# Altium PCB ExerciseMate_Receiver.PcbDoc
Units mm, origin at the board's own origin, x right, y up, seen from the top; angles counter-clockwise.
Board outline 50.8 x 39.24 mm, 4 copper layers (Top Layer, GND01, GND02, Bottom Layer), stack 0.603 mm thick; 29 components, 22 nets, 111 pads, 22 vias.
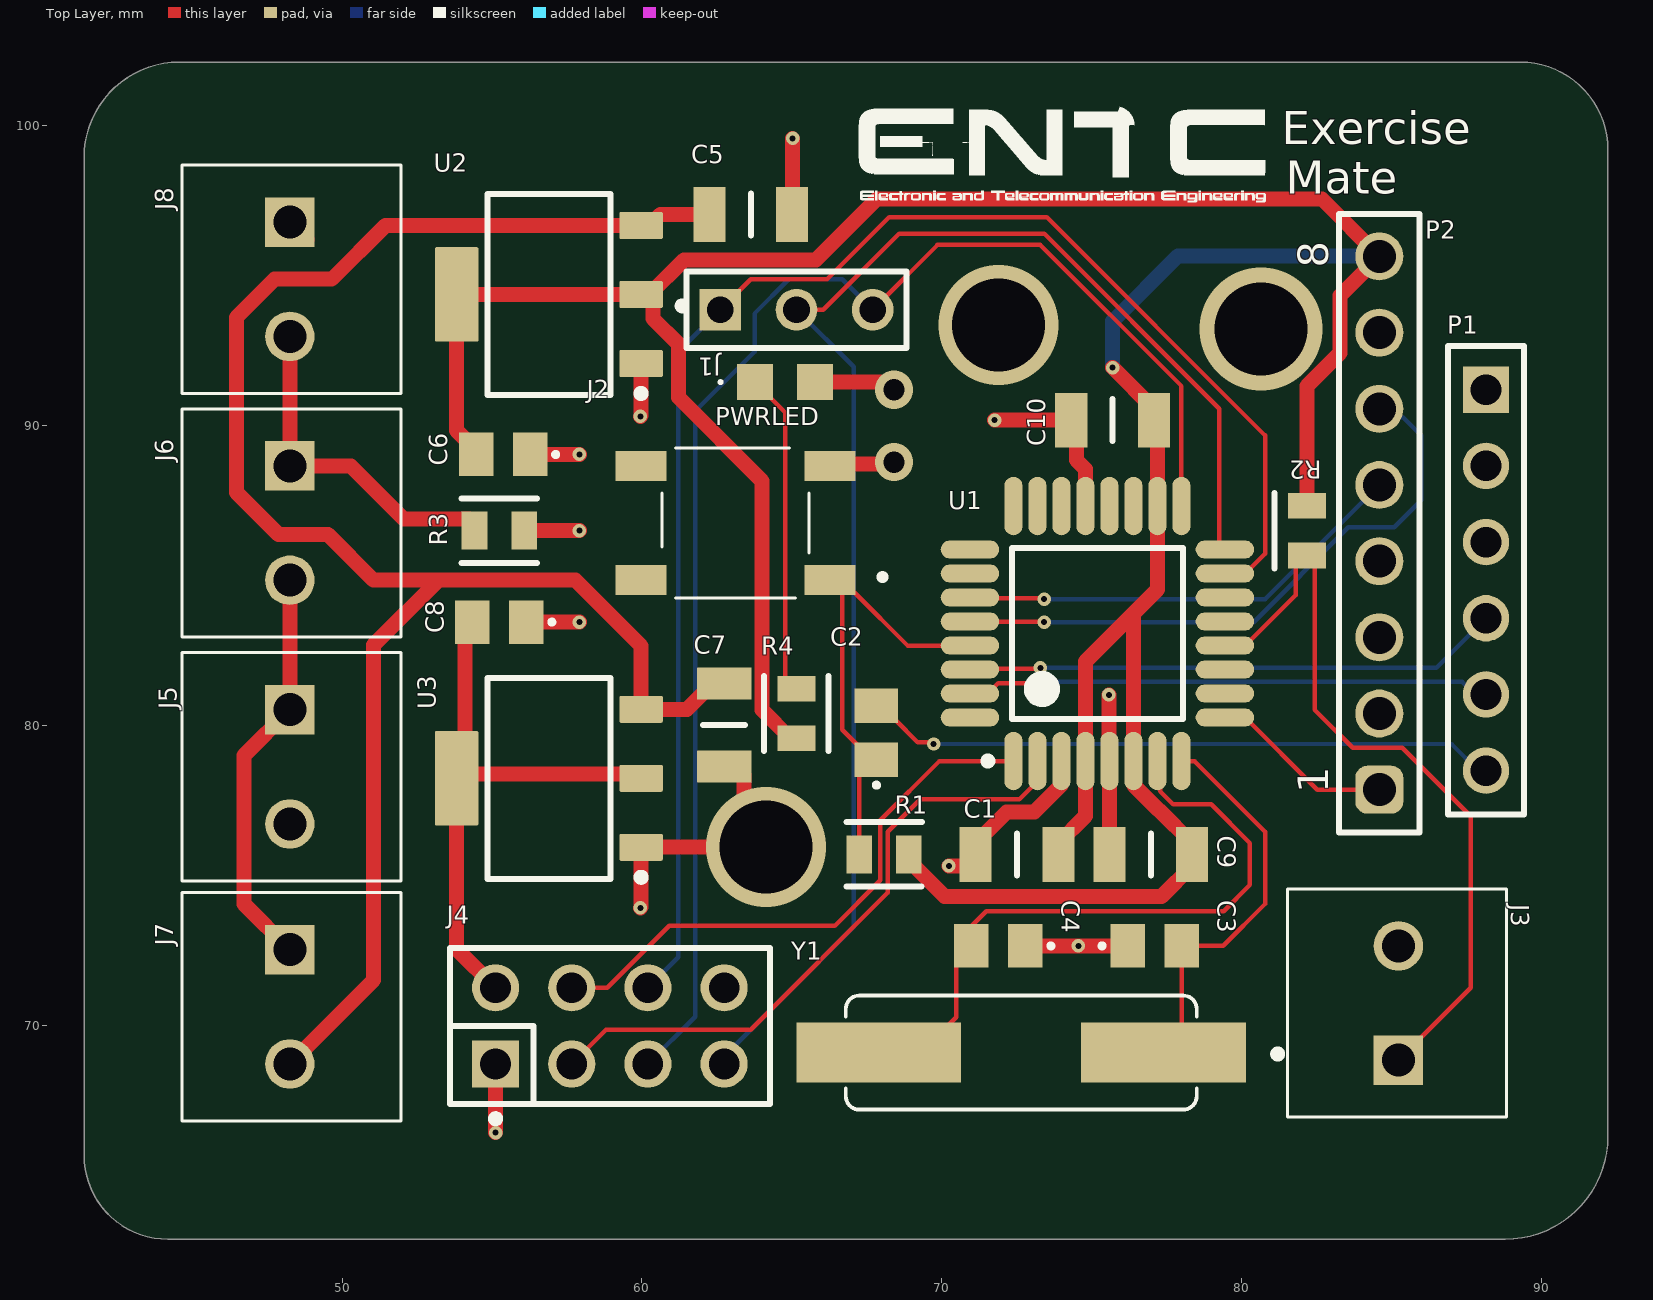
[diagram p0: Top Layer view]
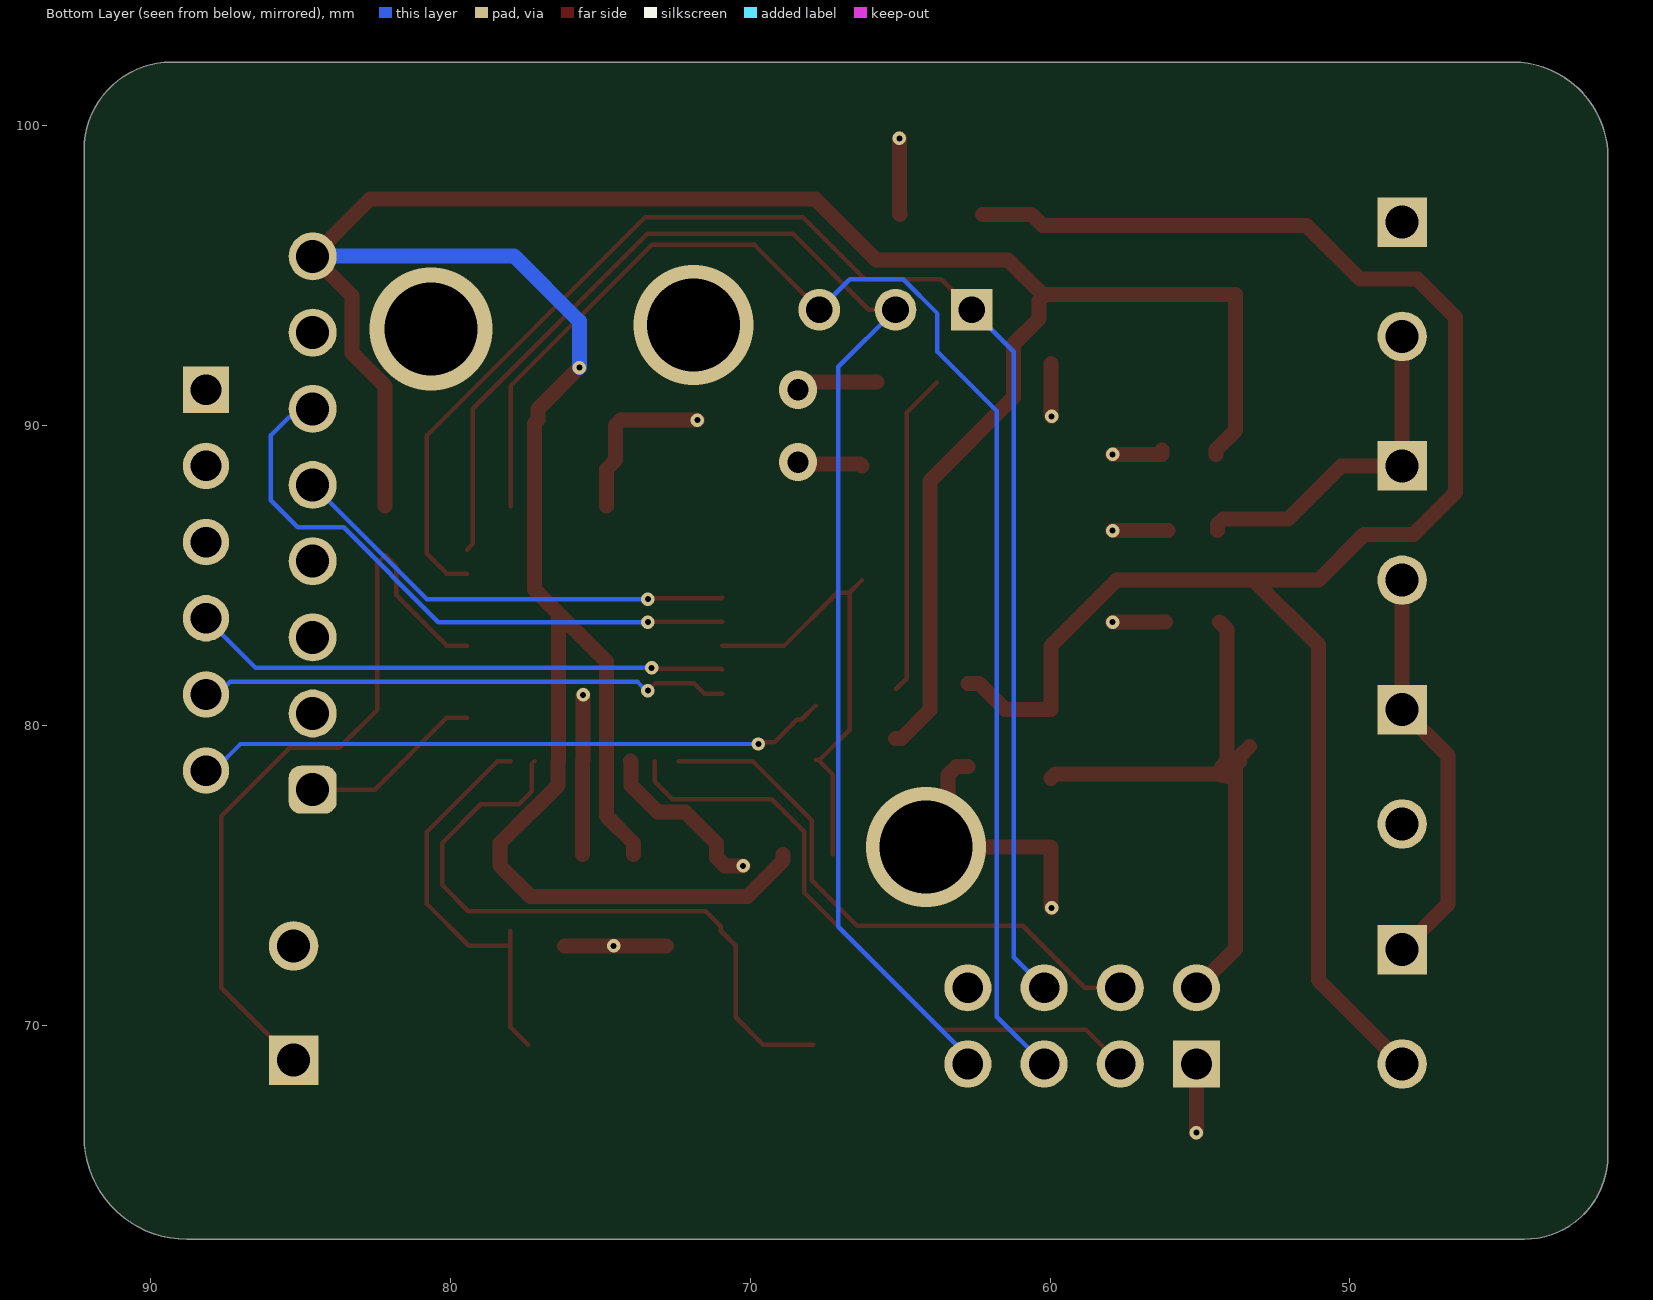
[diagram p1: Bottom Layer view, seen from below]
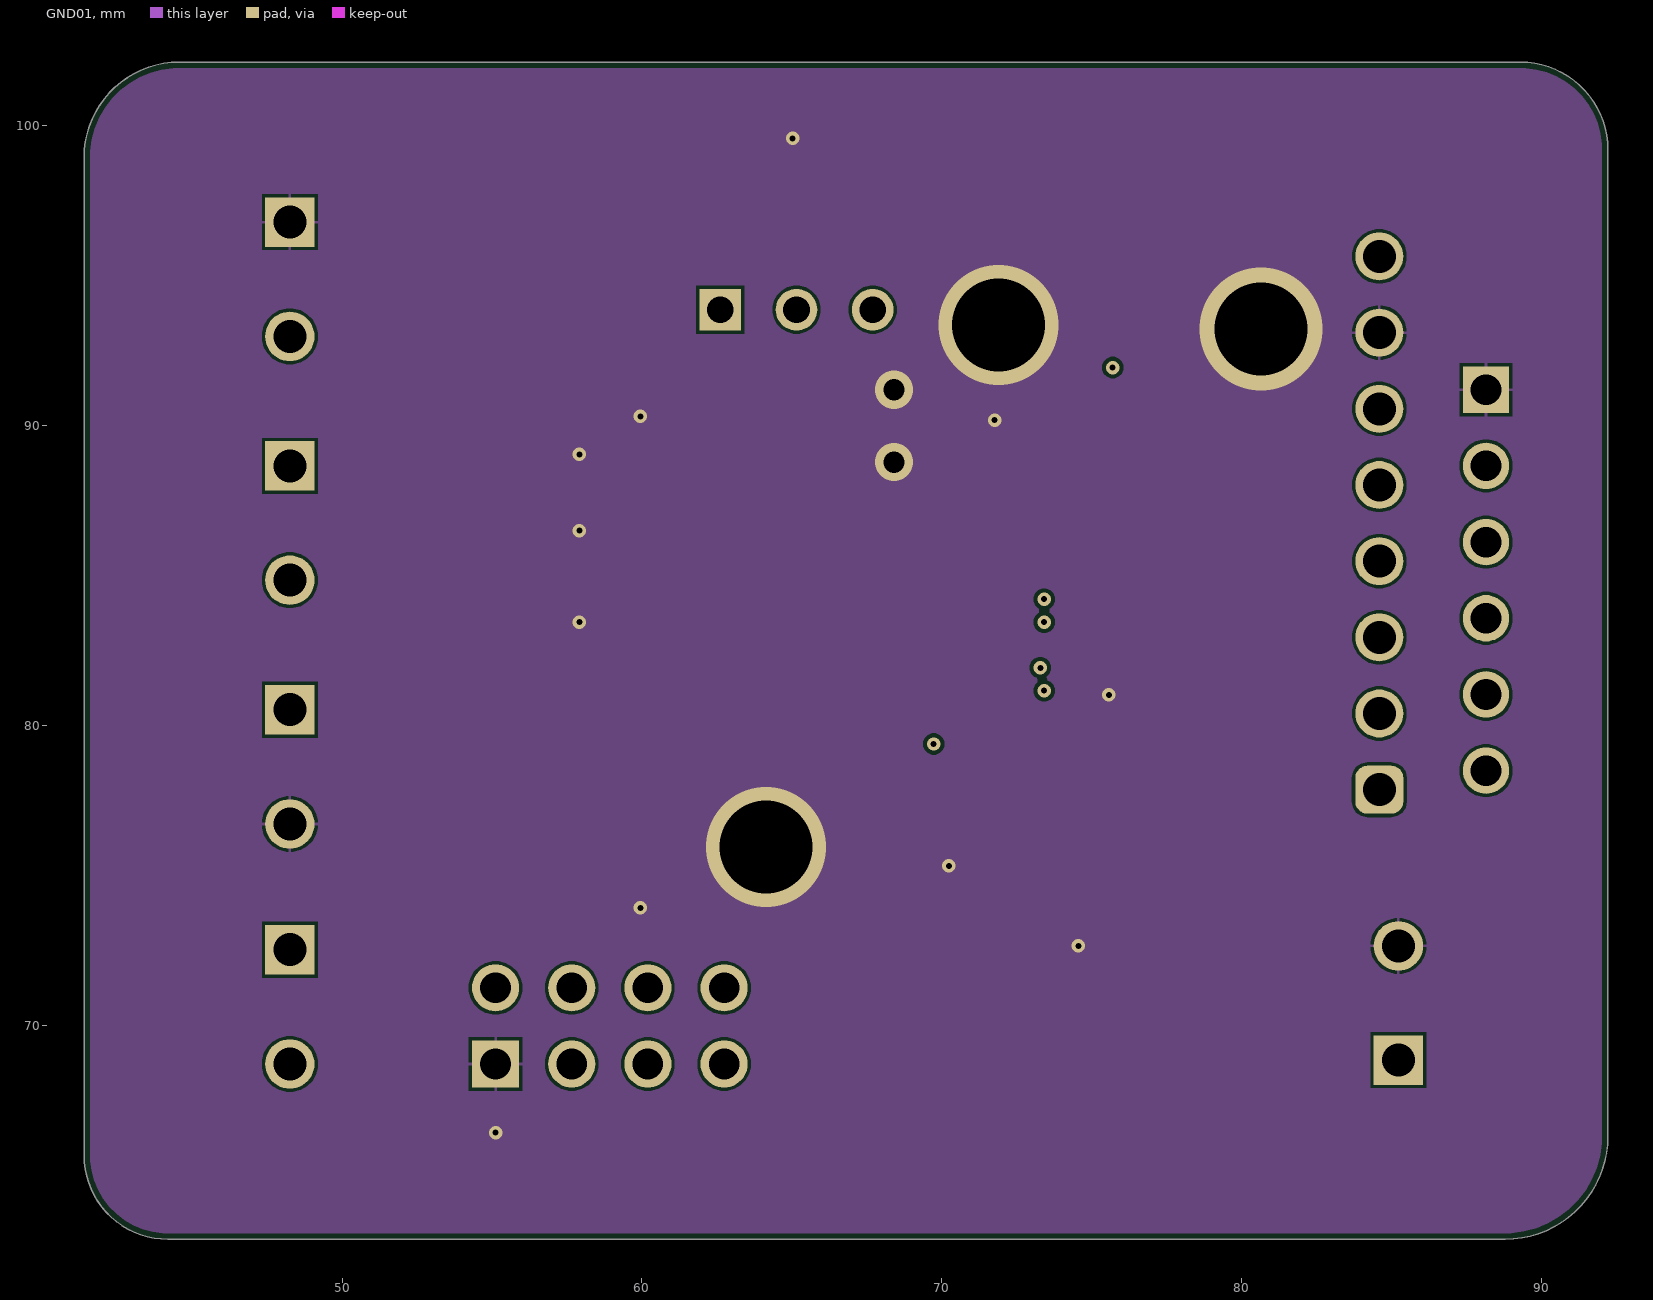
[diagram p2: GND01]
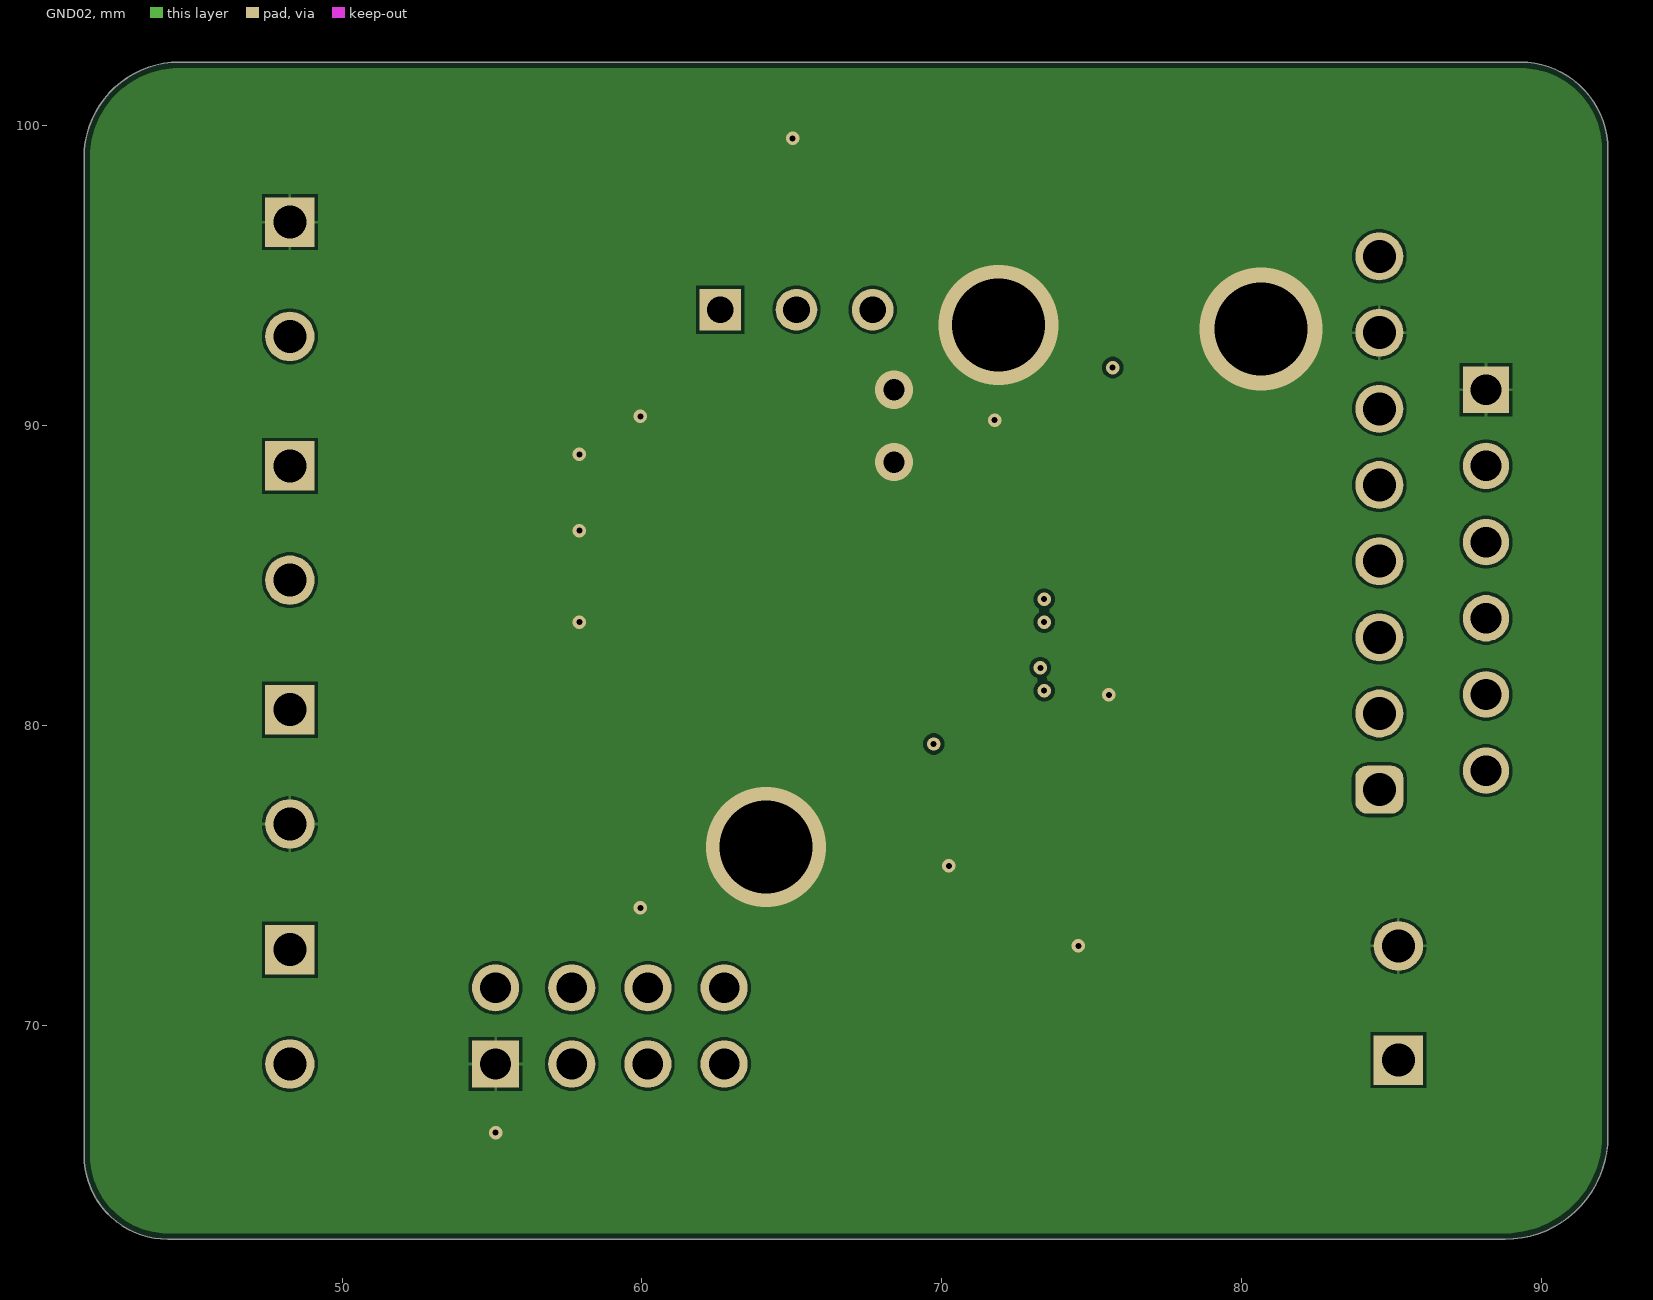
[diagram p3: GND02]
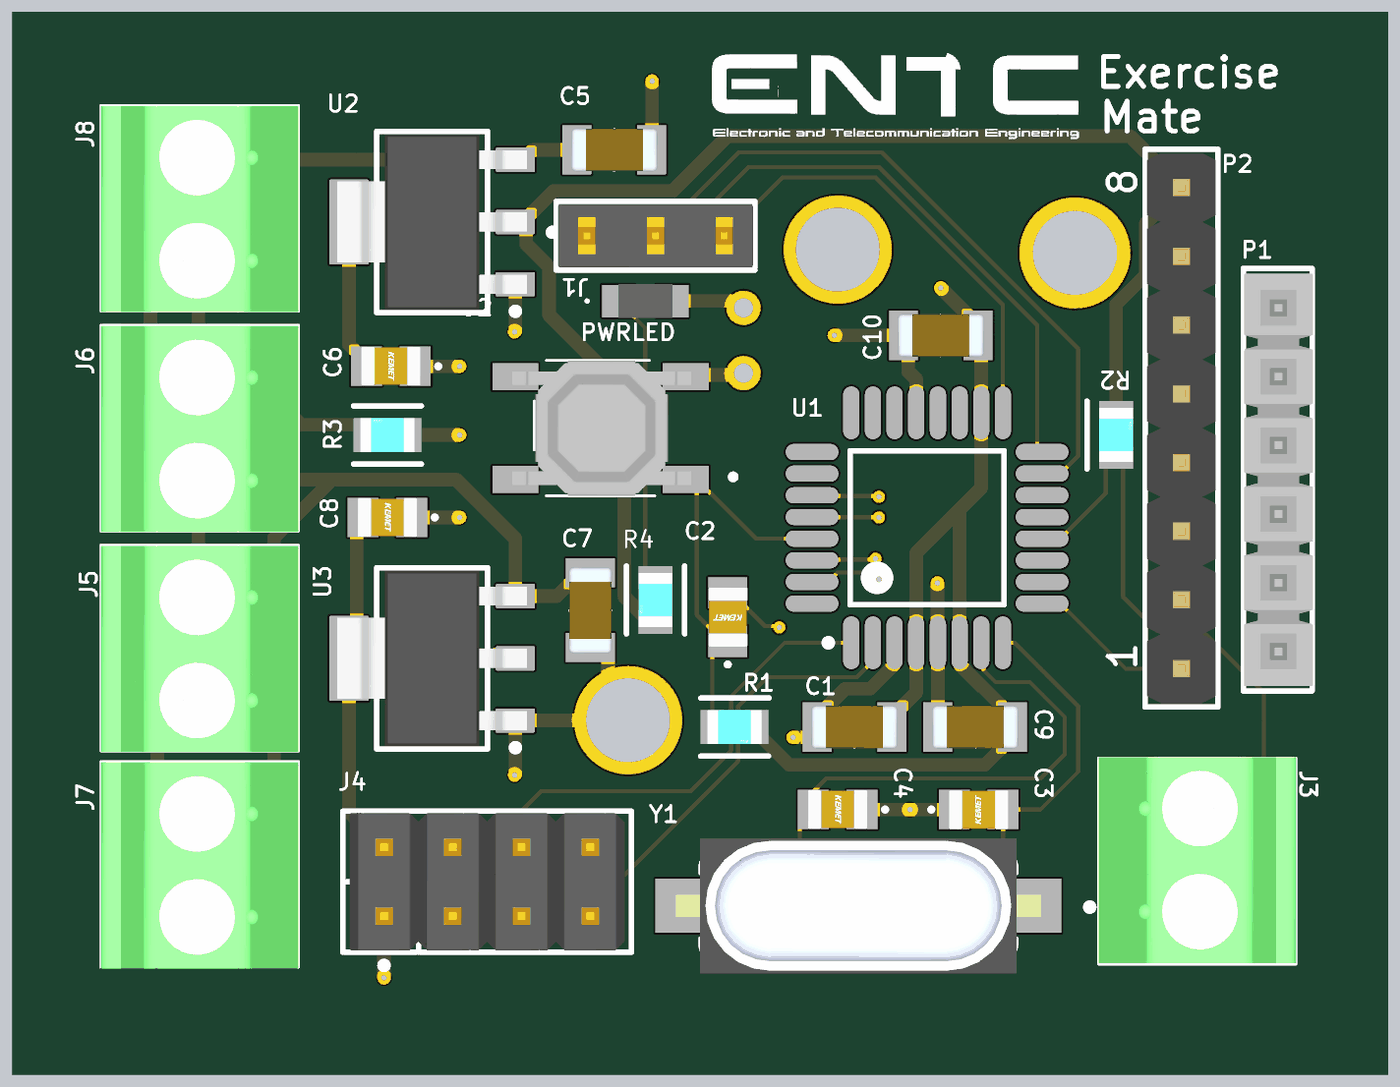
[diagram p4: 3D render of the assembled board from above, using the file's embedded part models]

## Layer stack, top to bottom
Top Solder: solder mask 0.0102, Solder Resist, Dk 3.5
Top Layer: signal copper 0.0356
Dielectric 2: prepreg 0.0711, PP-006, Dk 4.1
GND01: signal copper 0.035
Dielectric 1: dielectric 0.32, FR-4, Dk 4.8
GND02: signal copper 0.035
Dielectric 3: prepreg 0.0711, PP-006, Dk 4.1
Bottom Layer: signal copper 0.0356
Bottom Solder: solder mask 0.0102, Solder Resist, Dk 3.5

## Board outline
44.196,62.865 88.773,62.865 ccw(c88.773,66.294) 92.202,66.294 92.202,99.187 ccw(c89.281,99.187) 89.281,102.108 44.577,102.108 ccw(c44.577,98.933) 41.402,98.933 41.402,65.659 ccw(c44.196,65.659)

## Design rules (kind name [scope] priority, off if disabled: settings)
BoardOutlineClearance [All] p1: gap=0.2 ignorepadtopadclearanceinfootprint=FALSE
Clearance [All] p1: gap=0.102 ignorepadtopadclearanceinfootprint=FALSE except(0.127: Arc-Via Track-Via SMDPad-Via THPad-Via Via-Via Via-Fill Via-Poly Via-Region Via-Text; 0.25: Arc-Hole Track-Hole SMDPad-Hole THPad-Hole Via-Hole Fill-Hole Poly-Hole Region-Hole Text-Hole)
ComponentClearance [All] p1: gap=0.102 collisioncheckmode=3 verticalgap=0.102 showdistances=TRUE
DiffPairsRouting [All] p1: maxlimit=0.102 minlimit=0.102 mostfreqgap=0.102 toplayer_minwidth=0.102 toplayer_maxwidth=1816.048 toplayer_prefwidth=0.102 midlayer1_minwidth=0.102 midlayer1_maxwidth=1816.048 midlayer1_prefwidth=0.102 midlayer2_minwidth=0.102 midlayer2_maxwidth=1816.048 midlayer2_prefwidth=0.102 bottomlayer_minwidth=0.102 bottomlayer_maxwidth=1816.048 bottomlayer_prefwidth=0.102 maxuncoupledlength=12.7
Height [All] p1: minheight=0 maxheight=1816.048 prefheight=12.7
HoleSize [All] p1: absolutevalues=TRUE maxlimit=6.3 minlimit=0.2 maxpercent=80.000 minpercent=20.000
HoleToHoleClearance [All] p1: gap=0.25 allowstackedmicrovias=FALSE
MinimumAnnularRing [All] p1: minimumring=0.076
MinimumSolderMaskSliver [All] p1: minsoldermaskwidth=0
PlaneClearance [All] p1: clearance=0.102
PlaneConnect PlaneConnectPowerPads [InPadClass('PowerPads')] p1: planeconnectstyle=Direct reliefexpansion=0.508 reliefentries=4 reliefconductorwidth=0.254 reliefairgap=0.254
PlaneConnect [All] p2: pad.planeconnectstyle=Relief pad.reliefexpansion=0.3 pad.reliefentries=4 pad.reliefconductorwidth=0.102 pad.reliefairgap=0.102 via.planeconnectstyle=Direct via.reliefexpansion=0.3 via.reliefentries=4 via.reliefconductorwidth=0.127 via.reliefairgap=0.127
PolygonConnect PolygonConnectPowerPads [All vs (InPadClass('PowerPads'))] p1: connectstyle=Direct reliefconductorwidth=0.254 reliefentries=4 polygonreliefangle="90 Angle" airgapwidth=0.254
PolygonConnect [All] p2: thpad.connectstyle=Relief thpad.reliefconductorwidth=0.102 thpad.reliefentries=4 thpad.polygonreliefangle="90 Angle" thpad.airgapwidth=0.102 smdpad.connectstyle=Relief smdpad.reliefconductorwidth=0.102 smdpad.reliefentries=4 smdpad.polygonreliefangle="90 Angle" smdpad.airgapwidth=0.102 via.connectstyle=Direct via.reliefconductorwidth=0.127 via.reliefentries=4 via.polygonreliefangle="90 Angle" via.airgapwidth=0.127
RoutingVias [All] p1: holewidth=0.2 width=0.45 viastyle="Through Hole" minholewidth=0.2 minwidth=0.45 maxholewidth=6.3 maxwidth=6.55
SilkToSilkClearance [All] p1: silktosilkclearance=0
SilkToSolderMaskClearance [IsPad] p1: minsilkscreentomaskgap=0.102 clearancetoexposedcopper=TRUE
SolderMaskExpansion [All] p1: expansion=0.075 istentingtop=FALSE
Width [All] p1: maxlimit=1816.048 minlimit=0.102 preferedwidth=0.102
20 further rules are at their usual default settings.

## Classes and differential pairs
component class U_MCU: C1 C2 C3 C4 C9 C10 J1 J2 J3 P1 PWRLED R1 R2 R4 U1 Y1
component class top-level: J4 P2
component class Designator: C5 C6 C7 C8 J5 J6 J7 J8 R3 U2 U3

## Components (designator, comment, footprint, x,y, rotation, side; value= is the part's Value field where it differs from the comment)
C1 "10uF" CAPC3216X180N 72.5,75.692 r180 top
C2 "C0805R104J5RACTU" C0805 67.818,79.756 r90 top value=0.1uF
C3 "C0805C220F1HACTU" C0805 77.089,72.644 r0 top value=22pF
C4 "C0805C220F1HACTU" C0805 71.882,72.644 r180 top value=22pF
C5 "10uF" CAPC3216X180N 63.627,97.028 r0 top
C6 "C0805R104J5RACTU" C0805 55.372,89.027 r180 top value=0.1uF
C7 "10uF" CAPC3216X180N 62.738,80.01 r270 top
C8 "C0805R104J5RACTU" C0805 55.245,83.439 r180 top value=0.1uF
C9 "10uF" CAPC3216X180N 76.962,75.692 r180 top
C10 "10uF" CAPC3216X180N 75.692,90.17 r180 top
J1 "87224-3" FP-87224-3-MFG 65.151,93.853 r0 top
J2 "8-1437565-1" 814375651 63.119,86.741 r180 top
J3 "1727010" 1727010 85.217,68.834 r90 top
J4 "PBC04DAAN" FP-PBC04DAAN-MFG 58.928,69.977 r0 top
J5 "1727010" 1727010 48.26,80.518 r270 top value=Charger
J6 "1727010" 1727010 48.26,88.646 r270 top value=Main(9V)
J7 "1727010" 1727010 48.26,72.517 r270 top
J8 "1727010" 1727010 48.26,96.774 r270 top value=Backup(7.4V)
P1 "TSW-106-07-L-S" SMTC-TSW-106-07-X-S 88.138,91.186 r270 top value=Coding
P2 "61300811121" 61300811121 84.582,86.741 r90 top
PWRLED "598-2105-107F" 5982105107F 64.77,91.44 r180 top
R1 "10k" FP-RK73H2A-IPC_C 68.072,75.692 r0 top
R2 "10k" FP-RK73H2A-IPC_C 82.169,86.487 r90 top value=10K
R3 "0k" FP-RK73H2A-IPC_C 55.245,86.487 r180 top
R4 "220ohms" FP-RK73H2A-IPC_C 65.151,80.391 r270 top
U1 "ATmega328P-AU" 32A_M 75.184,83.058 r90 top
U2 "LM1117MPX-5.0/NOPB" DCY0004A_L 56.896,94.361 r180 top value="5V LDO"
U3 "LM1117MPX-3.3/NOPB" DCY0004A_L 56.896,78.232 r180 top value="3.3V LDO"
Y1 "FOXSDLF/160-20" XTAL_FOXSDLF/160-20 72.644,69.088 r180 top

## Footprints (in the part's own frame and the unit in brackets; to place one, negate y for a bottom-side part, rotate by r counter-clockwise, add the part's x,y. Pads: shape width x height; smd on the part's side, far side on the other; paste and mask are expansions set on the pad)
32A_M [mm] "Thin QFP, 32-Leads, Body 7x7mm, Pitch 0.8mm, IPC Low Density"
  oval 1.95x0.6 smd: 1(-4.25,2.8) 2(-4.25,2) 3(-4.25,1.2) 4(-4.25,0.4) 5(-4.25,-0.4) 6(-4.25,-1.2) 7(-4.25,-2) 8(-4.25,-2.8) 17(4.25,-2.8) 18(4.25,-2) 19(4.25,-1.2) 20(4.25,-0.4) 21(4.25,0.4) 22(4.25,1.2) 23(4.25,2) 24(4.25,2.8)
  oval 0.6x1.95 smd: 9(-2.8,-4.25) 10(-2,-4.25) 11(-1.2,-4.25) 12(-0.4,-4.25) 13(0.4,-4.25) 14(1.2,-4.25) 15(2,-4.25) 16(2.8,-4.25) 25(2.8,4.25) 26(2,4.25) 27(1.2,4.25) 28(0.4,4.25) 29(-0.4,4.25) 30(-1.2,4.25) 31(-2,4.25) 32(-2.8,4.25)
  silkscreen extent -4.37,-2.85 2.85,3.77, body extent -3.5,-3.5 3.5,3.5, height 1.2
1727010 [mm]
  rect 1.65x1.65 hole 1.1: 1(0,0)
  round 1.65 hole 1.1: 2(3.81,0)
  silkscreen extent -1.9,-3.6 5.71,3.7, body extent -1.87,-3.6 5.75,3.7, height 8.41
814375651 [mm]
  rect 1.7x1 smd: 1(-3.15,1.9) 2(3.15,1.9) 3(-3.15,-1.9) 4(3.15,-1.9)
  silkscreen extent -5,-2.5 2.45,2.5, body extent -3.34,-2.5 3.26,2.5, height 1.5
5982105107F [mm]
  rect 1.2x1.2 smd: 1(1,0) 2(-1,0)
  silkscreen extent 2.1,-0.05 2.2,0.05, body extent -1,-0.63 1,0.63, height 0.91
61300811121 [mm] "Pin Header, pitch 2.54 mm, THT, Vertical, single row, 8p"
  rrect50% 1.6x1.6 hole 1.1: 1(-8.89,0)
  round 1.6 hole 1.1: 2(-6.35,0) 3(-3.81,0) 4(-1.27,0) 5(1.27,0) 6(3.81,0) 7(6.35,0) 8(8.89,0)
  silkscreen extent -10.31,-1.34 10.31,1.34, body extent -10.16,-1.27 10.16,1.27, height 8.57
C0805 [mm]
  rect 1.15x1.45 smd: 1(-0.9,0) 2(0.9,0)
  silkscreen extent -1.8,-0.05 -1.7,0.05, body extent -1.1,-0.73 1.1,0.72, height 0.88
CAPC3216X180N [mm]
  rect 1.07x1.82 smd: 1(-1.38,0) 2(1.38,0)
  silkscreen extent 0,-0.7 0,0.7, body extent -1.6,-0.8 1.6,0.8, height 1.8
DCY0004A_L [mm] "SOT223, 4-Leads, Body 6.7x3.7mm, Pitch 2.3mm, IPC High Density"
  rrect11% 1.45x0.9 smd: 1(-3.075,2.3) 2(-3.075,0) 3(-3.075,-2.3)
  rrect7% 1.45x3.15 smd: 4(3.075,0)
  silkscreen extent -3.2,-3.35 2.05,3.42, body extent -3.5,-3.25 3.5,3.25, height 1.62
FP-87224-3-MFG [mil]
  rect 54.69x54.69 hole 35 paste-99999 mask+0: 1(-100,0)
  round 54.69 hole 35 paste-99999 mask+0: 2(0,0) 3(100,0)
  silkscreen extent -155,-50 145,50, body extent -148,-54 148,54, height 10
FP-PBC04DAAN-MFG [mm]
  rect 1.57x1.57 hole 1.02 paste-2539.97 mask+0: 1(-3.81,-1.27)
  round 1.57 hole 1.02 paste-2539.97 mask+0: 2(-3.81,1.27) 3(-1.27,-1.27) 4(-1.27,1.27) 5(1.27,-1.27) 6(1.27,1.27) 7(3.81,-1.27) 8(3.81,1.27)
  silkscreen extent -5.34,-3.22 5.34,2.61, body extent -5.44,-2.71 5.44,2.71, height 0.25
FP-RK73H2A-IPC_C [mil]
  rect 33.67x49.69 smd paste+0 mask+0: 1(-32.5,0) 2(32.5,0)
  silkscreen extent -49,-42 50,42, body extent -53,-31 53,31, height 10
SMTC-TSW-106-07-X-S [mm] ".025 SQ Post Terminal Strip Assembly, 1x6 Pins, Vertical, 2.54mm Pitch, Male"
  rect 1.55x1.55 hole 1.02: 1(0,0)
  round 1.55 hole 1.02: 2(2.54,0) 3(5.08,0) 4(7.62,0) 5(10.16,0) 6(12.7,0)
  silkscreen extent -1.46,-1.27 14.16,1.27, body extent -1.27,-1.24 13.97,1.3, height 8.38
XTAL_FOXSDLF/160-20 [mm]
  rect 5.5x2 smd: 1(-4.75,0) 2(4.75,0)
  silkscreen extent -8.6,-1.9 5.85,1.9, body extent -6.75,-2.5 6.75,2.5, height 4.5

## Part data
C1 C5 C7 C9 C10: library part GRT31CR71E106KE13L, "Capacitor", Manufacturer_Name="Murata Electronics", Mouser Part Number=81-GRT31CR71E106KE3L, Datasheet Link=https://psearch.en.murata.com/capacitor/product/GRT31CR71E106KE13%23.html, Height=1.8mm, Manufacturer_Part_Number=GRT31CR71E106KE13L, Mouser Price/Stock=https://www.mouser.co.uk/ProductDetail/Murata-Electronics/GRT31CR71E106KE13L?qs=qkDYIeTQ%252BEltpBe08x6bHQ%3D%3D
C2 C6 C8: "Capacitor", Manufacturer_Name=KEMET, Mouser Part Number=80-C0805R104J5RACTU, Datasheet Link=https://content.kemet.com/datasheets/KEM_C1075_X7R_HT_SMD.pdf, Height=1.1mm, Manufacturer_Part_Number=C0805R104J5RACTU, Mouser Price/Stock=https://www.mouser.co.uk/ProductDetail/KEMET/C0805R104J5RACTU?qs=RcG8xmE7yp2JeihV4l474Q%3D%3D
C3 C4: "Capacitor", Manufacturer_Name=KEMET, Mouser Part Number=80-C0805C220F1HACTU, Datasheet Link=https://content.kemet.com/datasheets/KEM_C1007_X8R_ULTRA_150C_SMD.pdf, Height=1.1mm, Manufacturer_Part_Number=C0805C220F1HACTU, Mouser Price/Stock=https://www.mouser.co.uk/ProductDetail/KEMET/C0805C220F1HACTU?qs=W0yvOO0ixfE4AlEZ2t4a8A%3D%3D
J1: library part CMP-2000-05697-2, "CONN HEADER VERT 3POS 2.54MM", Color=Black, Contact Current Rating=3A, Flammability Rating="UL94 V-0", High Temperature Housing=No, Max Operating Temperature=105°C, Min Operating Temperature=-65°C, Package Quantity=520, Approvals=CSA, Board Standoff="No (Without)", Connector Type=Plug, Contact Gender=Male, Contact Material=Bronze, Contact Mating Length=8.08mm, Contact Plating=Gold, Contact Post Length=0.125inch, Contact Protection="No (Without)", Contact Shape=Square, Contact Type="Male Pin", Current Rating=3A, Depth=2.54mm, ELV=Compliant, Gasket="No (Without)", High Speed Serial Data Connector=No, Housing Color=Black, Housing Material=Thermoplastic, Keyed=No, Lead Free="Lead Free", Length=7.21mm, Mating Alignment="No (Without)", Mating Connector Lock="No (Without)", Mount="Through Hole", Number of Contacts=3, Number of Positions=3, Number of Rows=1, Orientation=Straight, Packaging=Carton, PCB Mount Retention=Without, PCB Mounting Orientation=Vertical, PCB Thickness=1.397mm, Pitch=2.54mm, Radiation Hardening=No, RoHS Compliant=Yes, Row Spacing=2.54mm, Selectively Loaded="No (Without)", Series="AMPMODU MOD II", Stabilizers="No (Without)", Strain Relief="No (Without)", Termination="Through Hole"
J2: "Connector", Manufacturer_Name="TE Connectivity", Mouser Part Number=506-8-1437565-1, Arrow Part Number=8-1437565-1, Arrow Price/Stock=https://www.arrow.com/en/products/8-1437565-1/te-connectivity?region=europe, Datasheet Link=https://www.te.com/commerce/DocumentDelivery/DDEController?Action=srchrtrv&DocNm=1654270-2&DocType=Catalog%20Section&DocLang=English&PartCntxt=8-1437565-1&DocFormat=pdf, Height=1.7mm, Manufacturer_Part_Number=8-1437565-1, Mouser Price/Stock=https://www.mouser.co.uk/ProductDetail/TE-Connectivity-PB/8-1437565-1?qs=%2FwXgF%2FfIho85SUhcdHoonw%3D%3D
J3 J5 J6 J7 J8: "Connector", Manufacturer_Name="Phoenix Contact", Mouser Part Number=651-1727010, Arrow Part Number=1727010, Arrow Price/Stock=https://www.arrow.com/en/products/1727010/phoenix-contact?region=nac, Datasheet Link=https://datasheet.datasheetarchive.com/originals/distributors/SFDatasheet-2/sf-00050638.pdf, Height=8.65mm, Manufacturer_Part_Number=1727010, Mouser Price/Stock=https://www.mouser.co.uk/ProductDetail/Phoenix-Contact/1727010?qs=JcjeNNoqGSMjtHhQoBJ7UA%3D%3D
J4: library part CMP-25680-000082-1, "CONN HEADER VERT 8POS 2.54MM", Color=Black, Package Quantity=1, Connector Type="Male Pin", Contact Material=Bronze, Contact Mating Length=0.23inch, Contact Plating=Gold, Contact Type="Male Pin", Gender=Male, Height=2.54mm, Housing Color=Black, Housing Material=Plastic, Lead Free="Lead Free", Length=10.2mm, Mount="Through Hole", Number of Contacts=8, Number of Positions=8, Number of Rows=2, Packaging=Bulk, Pitch=0.1inch, RoHS Compliant=Yes, Row Spacing=0.1inch, Termination=Solder, Width=5.08mm
P1: library part CMP-1024-00386-1, "0.025\" SQ Post Header, Through-hole, Vertical, -55 to 125 degC, 2.54 mm Pitch, 6-Pin, Male, RoHS", Manufacturer=Samtec, Temperature Range="-55 to 125 degC", ComponentLink1Description="Manufacturer URL", ComponentLink1URL=http://www.samtec.com, ComponentLink2Description=Datasheet, ComponentLink2URL=http://www.samtec.com/documents/webfiles/pdf/TSW_TH.PDF, ComponentLink3Description="Package Specification", ComponentLink3URL=http://www.samtec.com/documents/webfiles/cpdf/TSW-XXX-XX-XXX-X-XX-XXX-MKT.pdf, DatasheetVersion=F-214, Mounting Technology=Through-hole, Orientation=Vertical, PackageDescription=".025[0.64] SQ. Post Terminal Strip Assembly", PackageReference=TSW-106-07-X-S, PackageVersion="DM, 8/1988", PartNumber=TSW-106-07-L-S, Pitch="2.54 mm", RoHS=True
P2: library part CMP-1502-01076-2, Color=Black, Contact Resistance=20mΩ, Current Rating=3A, Max Operating Temperature=105°C, Min Operating Temperature=-40°C, Operating Supply Voltage=250V, Connector Type="Male Pin", Contact Material=Copper, Contact Mating Length=5.9944mm, Contact Plating=Gold, Gender=Male, Height=8.54mm, Lead Pitch=2.54mm, Mount="Through Hole", NexarPartId=32855533, Number of Contacts=8, Number of Pins=8, Number of Positions=8, Number of Rows=1, Orientation=Vertical, Packaging=Bulk, Pitch=2.54mm, REACH SVHC=Unknown, RoHS=Compliant, Termination=Solder, Voltage Rating=250V
PWRLED: "LED", Manufacturer_Name=Dialight, Mouser Part Number=645-598-2105-107F, Datasheet Link=https://s3-us-west-2.amazonaws.com/catsy.557/C18686.pdf, Height=0.8128mm, Manufacturer_Part_Number=598-2105-107F, Mouser Price/Stock=https://www.mouser.co.uk/ProductDetail/Dialight/598-2105-107F?qs=17ckDYBRdemC3ww5qaaOiA%3D%3D
R1 R2 R3 R4: library part CMP-04015-088604-1, "10kΩ ±1% 0.25W Chip Resistor 0805 Thick Film AEC-Q200 Qualified", Case Code (Imperial)=0805, Case Code (Metric)=2012, Max Operating Temperature=155°C, Min Operating Temperature=-55°C, Package Quantity=10000, Power Rating=125mW, Resistance=10kR, Resistor Type="Thick Film", Temperature Coefficient=100ppm/°C, Tolerance=1%, Voltage Rating=150V, Case/Package=0805, Construction=Rectangular, Depth=1.25mm, Height=0.5mm, Lead Free="Lead Free", Length=2mm, Military Standard=Not, Packaging="Tape and Reel", RoHS Compliant=Yes, Series=RK73H, Termination=SMD/SMT, Width=1.25mm
U1: library part CMP-0095-00269-2, "8-bit AVR Microcontroller, 32KB Flash, 1KB EEPROM, 2KB SRAM, 32-pin TQFP, Industrial Grade (-40°C to 85°C)", Code_JEDEC=MS-026-ABA, ComponentLink1Description="Manufacturer URL", ComponentLink1URL=http://www.atmel.com/, ComponentLink2Description="ATmega48A/48PA/88A/88PA/168A/168PA/328/328P Datasheet", ComponentLink2URL=http://www.atmel.com/dyn/resources/prod_documents/doc8271.pdf, ComponentLink3Description="ATmega48A/48PA/88A/88PA/168A/168PA/328/328P Summary", ComponentLink3URL=http://www.atmel.com/dyn/resources/prod_documents/8271S.pdf, DatasheetVersion="revD, May-2011", PackageDescription="32-Lead, 7x7x1.0 mm Body, 0.8mm Lead Pitch, Thin Profile Plastic Quad Flat Package (TQFP)", PackageReference=32A, PackageVersion="revC, Oct-2010", RevisionNote="DatasheetVersion & PackageVersion updated. URLs added."
U2: library part CMP-0062-01635-4, "800mA Low-Dropout Linear Regulator, 4-pin SOT-223, Pb-Free", Manufacturer="Texas Instruments", PackageTopMarking=XYTT*N06A, PowerWise=N, Code_IPC=SOT223-4, Code_JEDEC=TO-261-AA, ComponentLink1Description="Datasheet URL", ComponentLink1URL=http://www.ti.com/general/docs/lit/getliterature.tsp?genericPartNumber=LM1117-N&fileType=pdf, CompType="LDO IC", High-Reliability=Y, PackageDescription="Molded SOT-223, 6.50 x 3.56 x 1.6mm Body, 4 Lead, 2.3mm Pitch", PackageReference=DCY0004A, PartNumber=LM1117MPX-5.0/NOPB, PinCount=4, RoHS=Y
U3: library part CMP-0062-01639-4, "800mA Low-Dropout Linear Regulator, 4-pin SOT-223, Pb-Free", Manufacturer="Texas Instruments", PackageTopMarking=XYTT*N05A, PowerWise=N, Code_IPC=SOT223-4, Code_JEDEC=TO-261-AA, ComponentLink1Description="Datasheet URL", ComponentLink1URL=http://www.ti.com/general/docs/lit/getliterature.tsp?genericPartNumber=LM1117-N&fileType=pdf, CompType="LDO IC", High-Reliability=Y, PackageDescription="Molded SOT-223, 6.50 x 3.56 x 1.6mm Body, 4 Lead, 2.3mm Pitch", PackageReference=DCY0004A, PartNumber=LM1117MPX-3.3/NOPB, PinCount=4, RoHS=Y
Y1: "Microprocessor, Crystal; 16 Mhz; + 30 Ppm @ Degc; 7 Pf (Max.); 20 Pf; -20 Deg", Package="HC49SD Fox Electronics", Availability="In Stock", Check_prices=https://www.snapeda.com/parts/FOXSDLF/160-20/Fox+Electronics/view-part/?ref=eda, MF="Fox Electronics", MP=FOXSDLF/160-20, Price=None, SnapEDA_Link=https://www.snapeda.com/parts/FOXSDLF/160-20/Fox+Electronics/view-part/?ref=snap

## Via types
v1: diameter 0.45, hole 0.2, Top Layer to Bottom Layer, 17 vias
v2: diameter 4, hole 3.1, Top Layer to Bottom Layer, 2 vias
v3: diameter 1.27, hole 0.711, Top Layer to Bottom Layer, 2 vias
v4: diameter 4.1, hole 3.1, Top Layer to Bottom Layer, 1 vias

## Nets (pads, with @x,y where several pads share a name; then routed paths per layer and width w, separated by ;. In a path a pad name is that pad's centre, name@x,y a point inside that pad or via, vN(x,y) a via of type N, cw(c..) or ccw(c..) an arc to the next point about the centre after c; other vN are vias at no path point)
3.3V: C8.2 J4.2 U3.2 U3.4 | length 20.8
  Top Layer w0.5: U3.4@53.346,79.288 53.68,78.954 U3.4@53.68,78.781 ; U3.4@54.059,78.285 54.296,78.339 54.468,78.377 59.826,78.377 U3.2 ; U3.4@54.27,78.638 54.133,78.725 U3.4@54.102,78.745 ; C8.2 54.102,83.196 U3.4@54.102,78.745 ; J4.2 53.821,72.544 U3.4 ; U3.4 53.821,78.922 U3.4@54.102,78.745 ; U3.4 54.102,78.513 U3.4@54.102,78.745
+5: C1.1 C6.2 C9.1 C10.1 P2.8 R1.2 R2.2 R4.2 U1.4 U1.6 U1.18 U2.2 U2.4 | length 114.3
  Top Layer w0.5: C6.2 54.472,89.177 53.821,89.828 U2.4 U2.2 ; R4.2 64.948,79.566 64,80.513 64,88.146 61.214,90.932 61.214,92.71 60.37,93.554 60.37,94.161 60.17,94.361 U2.2 ; R1.2 68.897,75.489 70.091,74.295 77.32,74.295 78.342,75.317 78.342,76.067 77.237,77.172 77.223,77.172 76.403,77.992 76.403,78.789 U1.6 76.384,83.728 ; C1.1 73.88,76.067 74.784,76.971 U1.4 74.784,82.128 76.384,83.728 ; v1(75.692,91.925) 77.072,90.545 C10.1 77.184,90.058 U1.18 77.184,84.528 76.384,83.728 ; R2.2 82.169,91.31 83.27,92.411 83.27,94.319 P2.8 82.677,97.536 67.818,97.536 65.794,95.512 61.397,95.512 60.246,94.361 U2.2
  Bottom Layer w0.5: v1(75.692,91.925) 75.692,93.472 77.865,95.645 84.568,95.645 P2.8
DTR: C2.2 P1.6 | length 21.2
  Top Layer w0.15: C2.2 68.292,80.182 68.442,80.182 69.198,79.426 69.672,79.426 v1(69.723,79.375)
  Bottom Layer w0.15: v1(69.723,79.375) 86.99,79.375 87.879,78.486 P1.6
GND: C1.2 C3.1 C4.1 C5.2 C6.1 C7.2 C8.1 C9.2 C10.2 J2.3 J3.2 J4.1 J5.2 J8.1 P1.1 P2.7 PWRLED.2 R3.1 U1.3 U1.5 U1.21 U2.1 U3.1 | length 47.7
  Top Layer w0.5: J8.1 J8.1@48.835,96.199 ; v1(55.118,66.421) J4.1 ; R3.1 v1(57.912,86.487) ; C8.1 v1(57.912,83.439) ; C6.1@56.272,89.177 C6.1 v1(57.912,89.027) ; v1(59.944,73.914) 59.971,73.941 U3.1 59.978,75.939 64.128,75.939 v2(64.135,75.946) 64.135,76.893 63.398,77.63 63.398,78.345 63.113,78.63 C7.2 ; v1(59.944,90.297) 59.971,90.324 U2.1 ; C5.2 65.024,97.045 v1(65.024,99.568) ; PWRLED.2 67.939,91.44 68.193,91.186 v3(68.401,91.186) ; J2.3 66.335,88.707 68.335,88.707 v3(68.401,88.773) ; v1(70.231,75.311) 70.835,75.311 71.12,75.596 71.12,76.067 72.161,77.108 73.08,77.108 73.965,77.992 73.965,78.789 U1.3 ; v1(71.755,90.17) C10.2 74.485,89.997 74.485,88.837 74.784,88.538 U1.21 ; C4.1 C3.1 ; v1(75.565,81.016) 75.565,78.825 75.583,78.807 C9.2 C9.2
  other v1: 74.549,72.644
  other v2: 71.882,93.341
  other v4: 80.645,93.218
LDO_IN: C5.1 C7.1 J7.2 U2.3 U3.3 | length 62.1
  Top Layer w0.5: J7.2 51.052,71.499 51.052,82.675 53.213,84.836 ; C5.1 60.613,97.028 60.246,96.661 51.449,96.661 49.657,94.869 47.752,94.869 46.482,93.599 46.482,87.757 47.879,86.36 49.53,86.36 51.054,84.836 53.213,84.836 ; C7.1 62.363,81.39 61.505,80.532 U3.3 59.971,82.65 57.785,84.836 53.213,84.836
LiPo_Com: J6.1 J8.2 R3.2 | length 11.5
  Top Layer w0.5: J8.2 J6.1 50.292,88.646 52.07,86.868 54.242,86.868 54.419,86.69 R3.2
MISO: J1.2 J4.7 U1.16 | length 50.1
  Top Layer w0.15: J1.2 66.04,93.853 68.58,96.393 73.406,96.393 79.248,90.551 79.248,86.044 U1.16
  Bottom Layer w0.15: J4.7 62.738,68.961 67.056,73.279 67.056,91.948 J1.2
MOSI: J1.1 J4.6 U1.15 | length 51.6
  Top Layer w0.15: J1.1 63.627,94.869 66.167,94.869 68.24,96.942 73.492,96.942 80.772,89.662 80.772,85.721 80.109,85.058 U1.15
  Bottom Layer w0.15: J4.6 61.214,72.263 61.214,92.456 J1.1
NetPWRLED_1: PWRLED.1 R4.1 | length 10.8
  Top Layer w0.15: PWRLED.1 64.77,90.44 64.77,81.569 65.123,81.216 R4.1
PB0_ModeSelec: J3.1 R2.1 U1.12 | length 25.6
  Top Layer w0.15: U1.12 80.109,82.658 81.788,84.337 81.788,85.309 82.141,85.661 R2.1 82.423,85.407 82.423,80.518 83.693,79.248 85.344,79.248 87.63,76.962 87.63,71.247 J3.1
PD3_CNS_NRF: J4.4 U1.1 | length 19
  Top Layer w0.15: J4.4 58.838,71.247 60.908,73.317 66.434,73.317 67.945,74.828 67.945,76.835 69.918,78.808 U1.1
PD4_CE_NRF: J4.3 U1.2 | length 21.3
  Top Layer w0.15: J4.3 58.801,69.85 63.627,69.85 68.199,74.422 68.199,76.454 69.279,77.534 72.585,77.534 73.184,78.133 U1.2
PD5_INT_ACC: P2.1 U1.9 | length 6.1
  Top Layer w0.15: U1.9 80.109,80.258 82.516,77.851 P2.1
Reset: C2.1 J2.1 R1.1 U1.29 | length 15.7
  Top Layer w0.15: R1.1 67.246,78.356 67.746,78.856 C2.1 67.668,78.856 66.675,79.849 66.675,84.435 J2.1 66.694,84.416 67.095,84.416 68.853,82.658 U1.29
RX: P1.4 U1.30 | length 17.9
  Top Layer w0.15: U1.30 70.963,81.887 73.251,81.887 v1(73.279,81.915)
  Bottom Layer w0.15: v1(73.279,81.915) 86.487,81.915 P1.4
SCK: J1.3 J4.5 U1.17 | length 48.5
  Top Layer w0.15: J1.3 69.85,96.012 73.279,96.012 77.984,91.307 U1.17
  Bottom Layer w0.15: J4.5 61.776,70.285 61.776,90.478 63.754,92.456 63.754,93.726 64.897,94.869 66.675,94.869 J1.3
SCL: P2.6 U1.28 | length 20.7
  Top Layer w0.15: U1.28 70.944,83.448 73.397,83.448 v1(73.406,83.439)
  Bottom Layer w0.15: v1(73.406,83.439) 80.391,83.439 83.551,86.599 85.075,86.599 85.979,87.503 85.979,89.662 85.367,90.274 84.859,90.274 P2.6
SDA: P2.5 U1.27 | length 15.2
  Top Layer w0.15: U1.27 70.963,84.229 73.378,84.229 v1(73.406,84.201)
  Bottom Layer w0.15: v1(73.406,84.201) 80.772,84.201 P2.5
TX: P1.5 U1.31 | length 17.7
  Top Layer w0.15: U1.31 71.529,81.058 71.878,81.407 73.152,81.407 v1(73.406,81.153)
  Bottom Layer w0.15: v1(73.406,81.153) 73.463,81.153 73.752,81.443 87.35,81.443 87.767,81.026 P1.5
Vin: J5.1 J6.2 J7.1 | length 13.6
  Top Layer w0.5: J7.1 46.736,74.041 46.736,78.994 J5.1 J6.2
XTLA1: C4.2 U1.7 Y1.2 | length 22.2
  Top Layer w0.15: Y1.2@67.894,69.342 69.557,69.342 70.482,70.267 70.482,72.652 70.982,73.152 70.982,73.302 71.482,73.802 79.39,73.802 80.264,74.676 80.264,76.073 78.976,77.361 77.706,77.361 77.27,77.797 77.27,78.722 U1.7
XTLA2: C3.2 U1.8 Y1.1 | length 13.6
  Top Layer w0.15: Y1.1@77.394,69.342 77.989,69.937 C3.2 ; U1.8 77.987,78.805 78.421,78.805 80.772,76.454 80.772,74.041 79.375,72.644 C3.2 ; C3.2@77.989,73.152 C3.2
pads on no net: J2.2 J2.4 J4.8 P1.2 P1.3 P2.2 P2.3 P2.4 U1.10 U1.11 U1.13 U1.14 U1.19 U1.20 U1.22 U1.23 U1.24 U1.25 U1.26 U1.32

## Polygon pours and split planes (outlines as drawn)
GND on GND01 "GND01" (solid, pour order 0): 44.196,62.865 88.773,62.865 ccw(c88.773,66.294) 92.202,66.294 92.202,99.187 ccw(c89.281,99.187) 89.281,102.108 44.577,102.108 ccw(c44.577,98.933) 41.402,98.933 41.402,65.659 ccw(c44.196,65.659)
GND on GND02 "GND02" (solid, pour order 1): 44.196,62.865 88.773,62.865 ccw(c88.773,66.294) 92.202,66.294 92.202,99.187 ccw(c89.281,99.187) 89.281,102.108 44.577,102.108 ccw(c44.577,98.933) 41.402,98.933 41.402,65.659 ccw(c44.196,65.659)

## Silkscreen, mask and mechanical layers (free items; w line width, h text height)
Top Overlay:
  drawing of 53 lines, arcs and shapes, not listed
  text "Exercise" at 81.333,99.367 h1.1
  text "Mate" at 81.46,97.716 h1.1
Mechanical 13:
  lines w0.254: 41.529,65.579 ccw(c44.116,65.579) 44.116,62.992 88.826,62.992 ccw(c88.826,66.24) 92.075,66.241 92.075,99.252 ccw(c89.346,99.252) 89.346,101.981 44.512,101.981 ccw(c44.512,98.998) 41.529,98.998 41.529,65.579

## Text inside footprints (layer, text, board x,y; h text height)
P2: Top Overlay "1" at 82.882,77.731 h1.02 r90; Top Overlay "8" at 82.882,95.251 h1.02 r90